# EAGLE board Task 3 use I2C (EAGLE 9.7.0)

Size 236 x 202.49 mm. Coordinates in mm from the lower left corner, seen from the top.
Outline: 0,0 236,0 236,202.49 0,202.49 0,0
Copper layers (1*16): Top 0.035mm / dielectric 1.5mm / Bottom 0.035mm
Design rules "default": minimum track width 6mil, minimum drill 0.35mm, track to track 6mil, track to pad 6mil, pad to pad 6mil, via to via 6mil, smd to smd 6mil, copper to edge 40mil, drill to drill 6mil, minimum pad ring 10mil, minimum via ring 8mil, stop-mask expansion 4mil, vias tented up to drill 0mil, thermal gap 10mil

## Footprints (pad centres in the part's own frame; a part is rotated, then mirrored left to right if it is on the bottom)
BATTERY-GENERIC = drill 1.118 pad 3.15 octagon: + 2.54,0; - -2.54,0
1X06 = drill 1.016 long: 1 -6.35,0; 2 -3.81,0; 3 -1.27,0; 4 1.27,0; 5 3.81,0; 6 6.35,0
RESAD1016W63L850D250B = drill 0.83 pad 1.43: 1 -5.08,0; 2 5.08,0
HA-06-SM065 = drill 1 pad 1.676: 1 -2.54,-2.54; 2 0,2.54; 3 2.54,-2.54
LCD-I2C = drill 1.016 long: 1 -19.05,-5.08; 2 -19.05,-7.62; 3 -19.05,-10.16; 4 -19.05,-12.7
DIP762W53P254L1969H508Q16B = drill 0.743 pad 1.343: 1 -3.81,8.89; 2 -3.81,6.35; 3 -3.81,3.81; 4 -3.81,1.27; 5 -3.81,-1.27; 6 -3.81,-3.81; 7 -3.81,-6.35; 8 -3.81,-8.89; 9 3.81,-8.89; 10 3.81,-6.35; 11 3.81,-3.81; 12 3.81,-1.27; 13 3.81,1.27; 14 3.81,3.81; 15 3.81,6.35; 16 3.81,8.89
ARDUINO-UNO-R3-SHIELD = drill 1.016 pad 1.88: 3.3V 24.13,-2.54; 5V 24.13,0; A0 24.13,12.7; A1 24.13,15.24; A2 24.13,17.78; A3 24.13,20.32; A4 24.13,22.86; A5 24.13,25.4; AREF -24.13,-13.97; D2 -24.13,20.32; D3 -24.13,17.78; D4 -24.13,15.24; D5 -24.13,12.7; D6 -24.13,10.16; D7 -24.13,7.62; D8 -24.13,3.81; D9 -24.13,1.27; D10 -24.13,-1.27; D11 -24.13,-3.81; D12 -24.13,-6.35; D13 -24.13,-8.89; GND@0 24.13,2.54; GND@1 24.13,5.08; GND@2 -24.13,-11.43; IOREF 24.13,-7.62; NC 24.13,-10.16; RES 24.13,-5.08; RX -24.13,25.4; SCL -24.13,-19.05; SDA -24.13,-16.51; TX -24.13,22.86; VIN 24.13,7.62

## Placement (x,y rotation side)
BAT1  9V  [BATTERY-GENERIC]  182.91,179.87 270 top
M1  PINHD-1X06_1X06M  [1X06]  10.87,174.56 0 top
R11  10k  [RESAD1016W63L850D250B]  134.48,157.96 90 top
R12  10k  [RESAD1016W63L850D250B]  152.26,193.52 90 top
RPOT4  10k  [HA-06-SM065]  82.45,7.05 180 top
U1  LCD-16X2-I2CSUNFOUNDER-IIC  [LCD-I2C]  180.37,67 0 top
U2  L293E  [DIP762W53P254L1969H508Q16B]  143.37,177.01 90 top
U4  ARDUINO-UNO-R3-SHIELD  [ARDUINO-UNO-R3-SHIELD]  77.14,62.78 270 top

## Library data of the parts
BAT1 M1 R11 R12 RPOT4 U1 U2 U4 = Tinkercad

## Nets
BAT1+: BAT1.+ U2.8
BAT1-: BAT1.- M1.5 RPOT4.3 U1.1 U2.4 U2.5 U2.12 U2.13 U4.GND@0 U4.GND@1 U4.GND@2
U2_1-2EN: R11.2 U2.1
U2_3-4EN: R12.1 U2.9
U2_3Y: M1.1 U2.11
U2_4Y: M1.6 U2.14
U4_5V: M1.3 R11.1 R12.2 RPOT4.1 U1.2 U2.16 U4.5V
U4_A0: RPOT4.2 U4.A0
U4_A4: U1.3 U4.A4
U4_A5: U1.4 U4.A5
U4_D2: M1.4 U4.D2
U4_D4: M1.2 U4.D4
U4_D5: U2.15 U4.D5
U4_D6: U2.10 U4.D6

## Tracks (layer width: path | path; a pad name or v marks a point on that pad's centre or on a via)
BAT1+  (1 unrouted)
BAT1-  (10 unrouted)
U2_1-2EN  (1 unrouted)
U2_3-4EN  (1 unrouted)
U2_3Y  (1 unrouted)
U2_4Y  (1 unrouted)
U4_5V  (6 unrouted)
U4_A0  (1 unrouted)
U4_A4  (1 unrouted)
U4_A5  (1 unrouted)
U4_D2  (1 unrouted)
U4_D4  (1 unrouted)
U4_D5  (1 unrouted)
U4_D6  (1 unrouted)